# EAGLE board brd-relays3-draft2 (EAGLE 6.5.0)
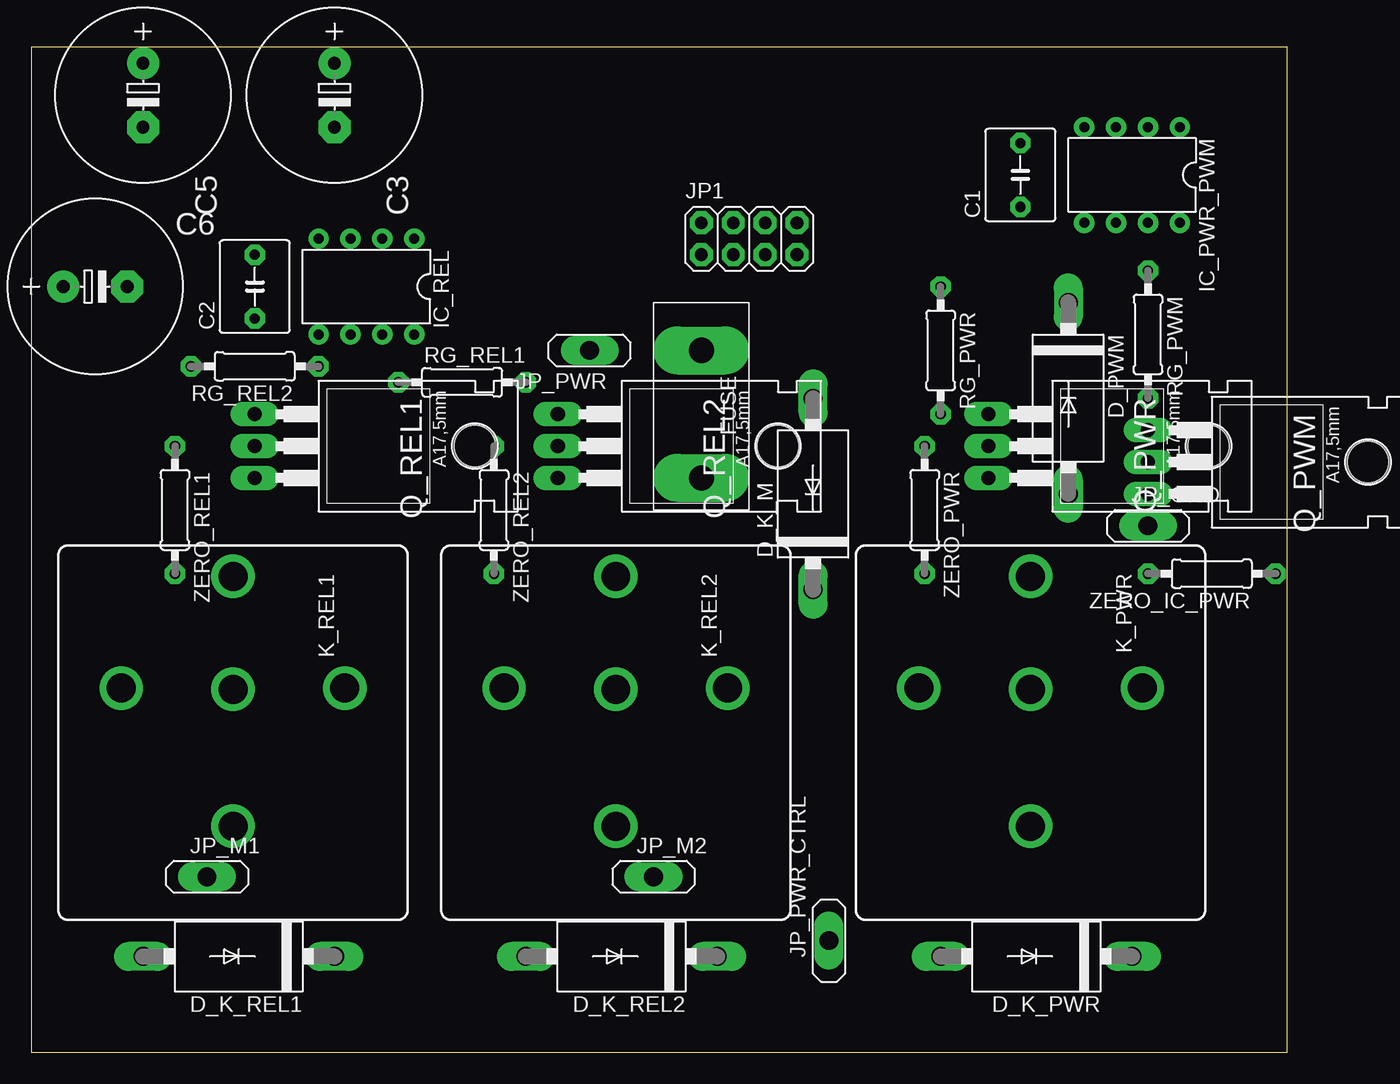
[diagram p0: board, top side]
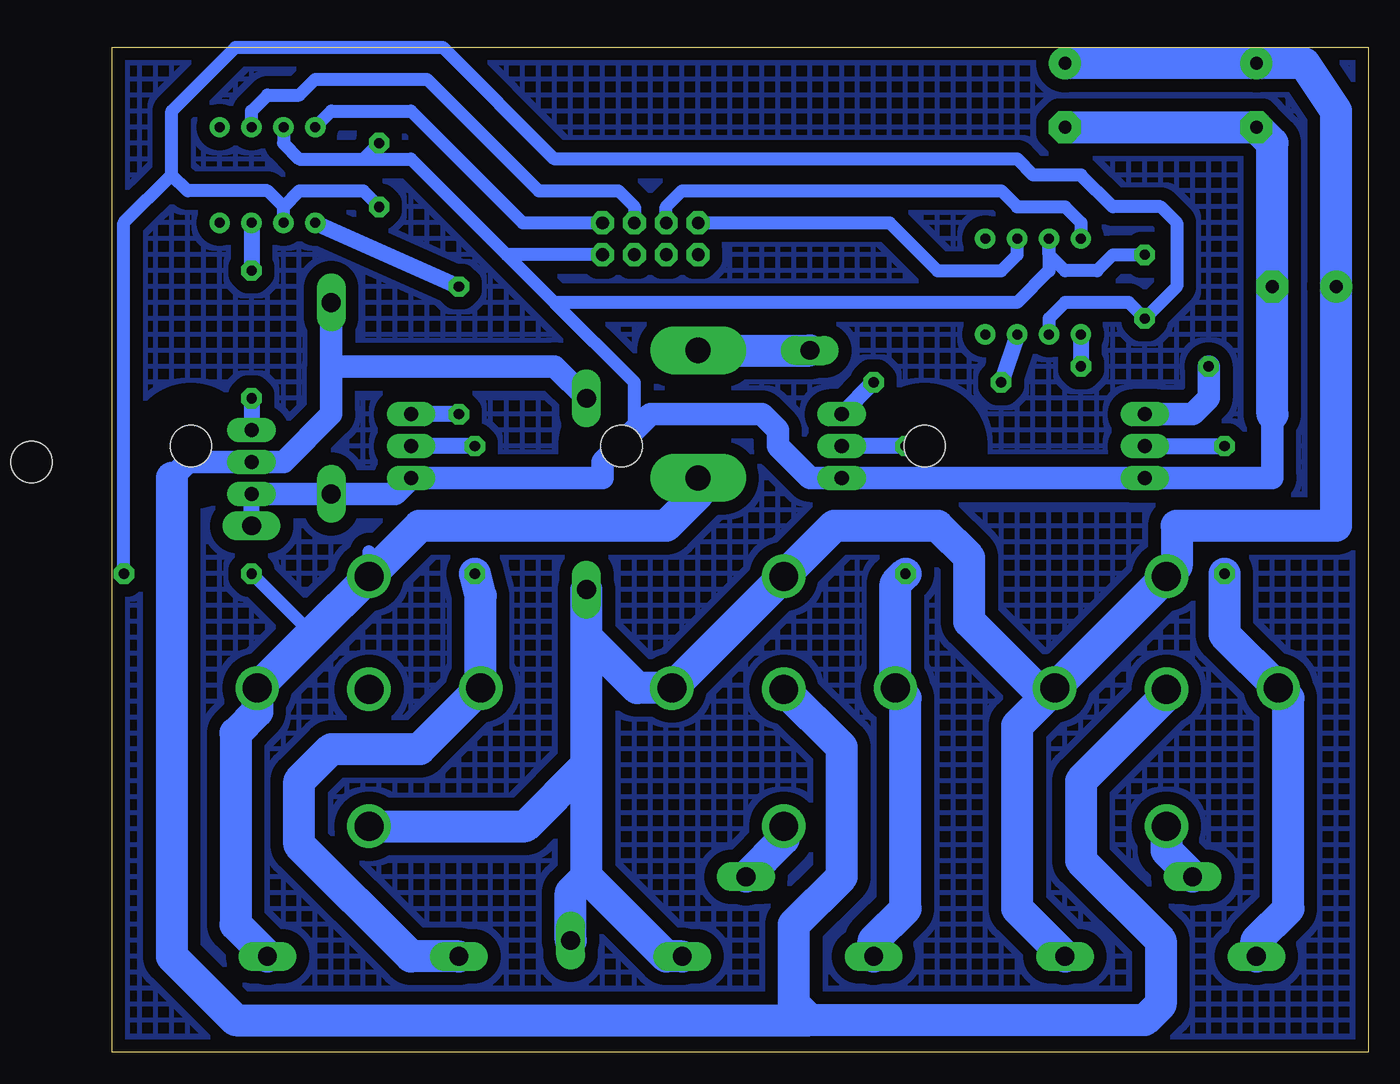
[diagram p1: board, bottom side, seen from below]

Size 100 x 80 mm. Coordinates in mm from the lower left corner, seen from the top.
Outline: 0,0 100,0 100,80 0,80 0,0
Copper layers (1*16): Top 0.035mm / dielectric 1.5mm / Bottom 0.035mm
Design rules "default": minimum track width 10mil, minimum drill 32mil, track to track 40mil, track to pad 40mil, pad to pad 40mil, via to via 40mil, smd to smd 12mil, copper to edge 40mil, drill to drill 40mil, minimum pad ring 16mil, minimum via ring 12mil, stop-mask expansion 4mil, vias tented up to drill 0mil, thermal gap 10mil

## Footprints (pad centres in the part's own frame; a part is rotated, then mirrored left to right if it is on the bottom)
C050-055X075 = drill 0.813 octagon: 1 -2.54,0; 2 2.54,0
E5-13 = drill 1.016 pad 2.54: + -2.54,0 | drill 1.016 pad 2.54 octagon: - 2.54,0
DO201-15 = drill 1.499 long: A 7.62,0; C -7.62,0
FUSE_PACK1 = drill 2 pad 3.81 long: 1 -5.08,0; 2 5.08,0
DIL08 = drill 0.8 pad 1.4: 1 -3.81,-3.81; 2 -1.27,-3.81; 3 1.27,-3.81; 4 3.81,-3.81; 5 3.81,3.81; 6 1.27,3.81; 7 -1.27,3.81; 8 -3.81,3.81
2X04 = drill 1.016 octagon: 1 -3.81,-1.27; 2 -3.81,1.27; 3 -1.27,-1.27; 4 -1.27,1.27; 5 1.27,-1.27; 6 1.27,1.27; 7 3.81,-1.27; 8 3.81,1.27
1X01 = drill 1.5 long: 1 0,0
CB1 = drill 2.3: 30 9.95,-3; 85 -1.05,-11.9; 86 -1.05,5.9; 87 -9.95,-3; 87A -0.95,-3
TO220BH = drill 1.118 pad 1.93 long: D 0,-6.35; G -2.54,-6.35; S 2.54,-6.35 | hole 3.302: 0,11.176
0207/10 = drill 0.813 octagon: 1 -5.08,0; 2 5.08,0

## Placement (x,y rotation side)
C1  [C050-055X075]  78.74,69.85 90 top
C2  [C050-055X075]  17.78,60.96 90 top
C3  [E5-13]  24.13,76.2 270 top
C5  [E5-13]  8.89,76.2 270 top
C6  [E5-13]  5.08,60.96 0 top
D_K_M  BY251  [DO201-15]  62.23,44.45 90 top
D_K_PWR  BY251  [DO201-15]  80.01,7.62 180 top
D_K_REL1  BY251  [DO201-15]  16.51,7.62 180 top
D_K_REL2  BY251  [DO201-15]  46.99,7.62 180 top
D_PWM  BY251  [DO201-15]  82.55,52.07 270 top
FUSE  [FUSE_PACK1]  53.34,50.8 270 top
IC_PWR_PWM  IR4427  [DIL08]  87.63,69.85 180 top
IC_REL  IR4427  [DIL08]  26.67,60.96 180 top
JP1  [2X04]  57.15,64.77 0 top
JP_GND  [1X01]  88.9,41.91 0 top
JP_M1  [1X01]  13.97,13.97 0 top
JP_M2  [1X01]  49.53,13.97 0 top
JP_PWR  [1X01]  44.45,55.88 180 top
JP_PWR_CTRL  [1X01]  63.5,8.89 90 top
K_PWR  CB1-P-12V  [CB1]  82.55,27.94 270 top
K_REL1  CB1-P-12V  [CB1]  19.05,27.94 270 top
K_REL2  CB1-P-12V  [CB1]  49.53,27.94 270 top
Q_PWM  IRLZ44Z  [TO220BH]  95.25,46.99 270 top
Q_PWR  IRLZ44Z  [TO220BH]  82.55,48.26 270 top
Q_REL1  IRLZ44Z  [TO220BH]  24.13,48.26 270 top
Q_REL2  IRLZ44Z  [TO220BH]  48.26,48.26 270 top
RG_PWM  [0207/10]  88.9,57.15 270 top
RG_PWR  [0207/10]  72.39,55.88 270 top
RG_REL1  [0207/10]  34.29,53.34 0 top
RG_REL2  [0207/10]  17.78,54.61 180 top
ZERO_IC_PWR  [0207/10]  93.98,38.1 180 top
ZERO_PWR  [0207/10]  71.12,43.18 270 top
ZERO_REL1  [0207/10]  11.43,43.18 270 top
ZERO_REL2  [0207/10]  36.83,43.18 270 top

## Library data of the parts
C1-C3 C5 C6 RG_PWM RG_PWR RG_REL1 RG_REL2 ZERO_IC_PWR ZERO_PWR ZERO_REL1 ZERO_REL2 = rcl
D_K_M D_K_PWR D_K_REL1 D_K_REL2 D_PWM = diode
FUSE JP_GND JP_M1 JP_M2 JP_PWR JP_PWR_CTRL Q_PWM Q_PWR Q_REL1 Q_REL2 = dbg-misc
IC_PWR_PWM IC_REL = ir; MF: INTERNATIONAL RECTIFIER(IR); MPN: IR4427; OC_FARNELL: 1023267; OC_NEWARK: 27C6914
JP1 = pinhead
K_PWR K_REL1 K_REL2 = dbg-misc; MF: AROMAT/ MATSUSHITA; MPN: CB1-P-12V; OC_FARNELL: unknown; OC_NEWARK: 52F9201

## Nets
GND: C1.2 C2.2 C3.- C5.- C6.- D_PWM.A IC_PWR_PWM.3 IC_REL.3 JP1.7 JP_GND.1 Q_PWM.S Q_PWR.S Q_REL1.S Q_REL2.S
N$1: FUSE.1 JP_PWR.1
N$2: JP_M2.1 K_REL2.30
N$3: IC_PWR_PWM.7 RG_PWM.1
N$4: IC_PWR_PWM.5 RG_PWR.1
N$5: Q_PWM.G RG_PWM.2
N$6: Q_PWR.G RG_PWR.2
N$7: IC_REL.7 RG_REL1.1
N$8: Q_REL2.G RG_REL1.2
N$9: IC_REL.5 RG_REL2.1
N$10: Q_REL1.G RG_REL2.2
N$11: IC_REL.2 JP1.2
N$12: IC_REL.4 JP1.4
N$13: IC_PWR_PWM.2 JP1.6
N$14: D_K_PWR.C FUSE.2 K_PWR.86 K_PWR.87 ZERO_IC_PWR.2
N$16: D_K_PWR.A K_PWR.85 ZERO_PWR.2
N$17: IC_PWR_PWM.4 JP1.8
N$18: JP_M1.1 K_REL1.30
N$19: Q_REL1.D ZERO_REL1.1
N$20: Q_REL2.D ZERO_REL2.1
N$21: Q_PWR.D ZERO_PWR.1
N$22: D_K_M.A D_PWM.C K_REL1.87A K_REL2.87A Q_PWM.D
N$23: D_K_REL1.A K_REL1.85 ZERO_REL1.2
N$24: C3.+ C5.+ C6.+ D_K_M.C D_K_REL1.C D_K_REL2.C JP_PWR_CTRL.1 K_PWR.30 K_REL1.86 K_REL1.87 K_REL2.86 K_REL2.87
N$25: D_K_REL2.A K_REL2.85 ZERO_REL2.2
VCC: C1.1 C2.1 IC_PWR_PWM.6 IC_REL.6 ZERO_IC_PWR.1

## Tracks (layer width: path | path; a pad name or v marks a point on that pad's centre or on a via)
GND
  Bottom 1.016: IC_PWR_PWM.3 86.36,72.39 85.09,71.12 80.01,71.12 | 80.01,71.12 C1.2 | 80.01,71.12 76.2,71.12 68.58,63.5 | 68.58,63.5 64.77,59.69 | 64.77,59.69 27.94,59.69 25.4,62.23 IC_REL.3 25.4,63.5 24.13,62.23 21.59,62.23 20.32,63.5 C2.2 | 58.42,49.53 58.42,53.34 64.77,59.69 | JP1.7 68.58,63.5
  Bottom 1.27: JP_GND.1 Q_PWM.S
  Bottom 1.778: Q_PWM.S D_PWM.A 77.47,44.45 Q_PWR.S 60.96,45.72 60.96,46.99 58.42,49.53 57.15,50.8 48.26,50.8 46.99,49.53 46.99,48.26 44.45,45.72 Q_REL2.S Q_REL1.S 7.62,45.72 7.62,50.8
  Bottom 2.54: 7.62,50.8 C6.- 7.62,72.39 C5.- C3.-
N$1
  Bottom 2.54: FUSE.1 JP_PWR.1
N$2
  Bottom 2.54: K_REL2.30 46.53,16.97 JP_M2.1
N$3
  Bottom 1.27: IC_PWR_PWM.7 RG_PWM.1
N$4
  Bottom 1.27: IC_PWR_PWM.5 RG_PWR.1
N$5
  Bottom 1.27: RG_PWM.2 Q_PWM.G
N$6
  Bottom 1.27: RG_PWR.2 Q_PWR.G
N$7
  Bottom 1.27: IC_REL.7 RG_REL1.1
N$8
  Bottom 1.27: RG_REL1.2 Q_REL2.G
N$9
  Bottom 1.27: IC_REL.5 RG_REL2.1
N$10
  Bottom 1.778: RG_REL2.2 12.7,52.07 13.97,50.8 Q_REL1.G
N$11
  Bottom 1.016: IC_REL.2 27.94,63.5 29.21,62.23 34.29,62.23 38.1,66.04 JP1.2
N$12
  Bottom 1.016: JP1.4 55.88,67.31 54.61,68.58 29.21,68.58 27.94,67.31 24.13,67.31 22.86,66.04 IC_REL.4
N$13
  Bottom 1.016: IC_PWR_PWM.2 88.9,74.93 87.63,76.2 85.09,76.2 83.82,77.47 74.93,77.47 66.04,68.58 59.69,68.58 58.42,67.31 JP1.6
N$14
  Bottom 1.016: K_PWR.87 79.55,39.83 | ZERO_IC_PWR.2 84.12,33.32
  Bottom 2.54: D_K_PWR.C 90.17,10.16 90.17,25.4 88.45,27.12 K_PWR.86 84.12,33.32 K_PWR.87 75.53,41.91 55.88,41.91 53.34,44.45 FUSE.2
N$15
  pour Bottom (isolate 0.813, hatched): 0,80.01 0,0 100.33,0 100.33,80.01
N$16
  Bottom 2.54: D_K_PWR.A 76.2,7.62 85.09,16.51 85.09,21.59 82.55,24.13 75.51,24.13 K_PWR.85 70.65,36.36 ZERO_PWR.2
N$17
  Bottom 1.016: IC_PWR_PWM.4 82.55,74.93 76.2,74.93 67.31,66.04 JP1.8
N$18
  Bottom 2.54: K_REL1.30 16.05,16.05 JP_M1.1
N$19
  Bottom 1.27: Q_REL1.D ZERO_REL1.1
N$20
  Bottom 1.27: ZERO_REL2.1 Q_REL2.D
N$21
  Bottom 1.27: ZERO_PWR.1 Q_PWR.D
N$22
  Bottom 1.778: 95.25,45.72 93.98,46.99 Q_PWM.D 86.36,46.99 82.55,50.8 82.55,54.61 | D_PWM.C 82.55,54.61 | 82.55,54.61 64.77,54.61 D_K_M.A
  Bottom 2.54: K_REL1.87A 16.05,28.4 22.86,21.59 22.86,15.24 16.51,8.89 16.51,3.81 17.78,2.54 44.45,2.54 | 44.45,2.54 45.72,3.81 45.72,10.16 41.91,13.97 41.91,24.27 K_REL2.87A | 95.25,45.72 95.25,7.62 90.17,2.54 44.45,2.54
N$23
  Bottom 2.54: D_K_REL1.A 8.89,8.89 6.35,11.43 6.35,28.19 K_REL1.85 11.43,33.27 ZERO_REL1.2
N$24
  Bottom 2.54: K_REL1.86 K_REL1.87 15.24,38.7 15.24,41.91 2.54,41.91 C6.+ 2.54,74.93 5.08,78.74 C5.+ C3.+ | K_REL1.86 26.45,28.99 31.75,34.29 31.75,39.37 34.29,41.91 42.51,41.91 K_REL2.87 K_REL2.86 58.2,28.99 62.23,33.02 D_K_M.C 62.23,22.86 | K_PWR.30 67.1,17.99 62.23,22.86 | D_K_REL2.C 55.88,7.62 62.23,13.97 | 62.23,13.97 62.23,22.86 | D_K_REL1.C 27.94,11.43 27.94,26 K_REL1.86 | JP_PWR_CTRL.1 63.5,12.7 62.23,13.97
N$25
  Bottom 2.54: D_K_REL2.A 39.37,8.89 36.83,11.43 36.83,28.19 K_REL2.85 37.63,37.3 ZERO_REL2.2
VCC
  Bottom 1.016: 86.36,67.31 85.09,68.58 80.01,68.58 C1.1 | IC_REL.6 25.4,58.42 24.13,59.69 19.05,59.69 C2.1 15.24,60.96 15.24,66.04 16.51,67.31 20.32,67.31 22.86,69.85 26.67,69.85 27.94,71.12 64.77,71.12 73.66,80.01 90.17,80.01 95.25,74.93 95.25,69.85 | IC_PWR_PWM.6 86.36,67.31 | 86.36,67.31 87.63,68.58 93.98,68.58 95.25,69.85 | ZERO_IC_PWR.1 99.06,66.04 95.25,69.85